# EAGLE board PIR Relay (EAGLE 9.6.2)
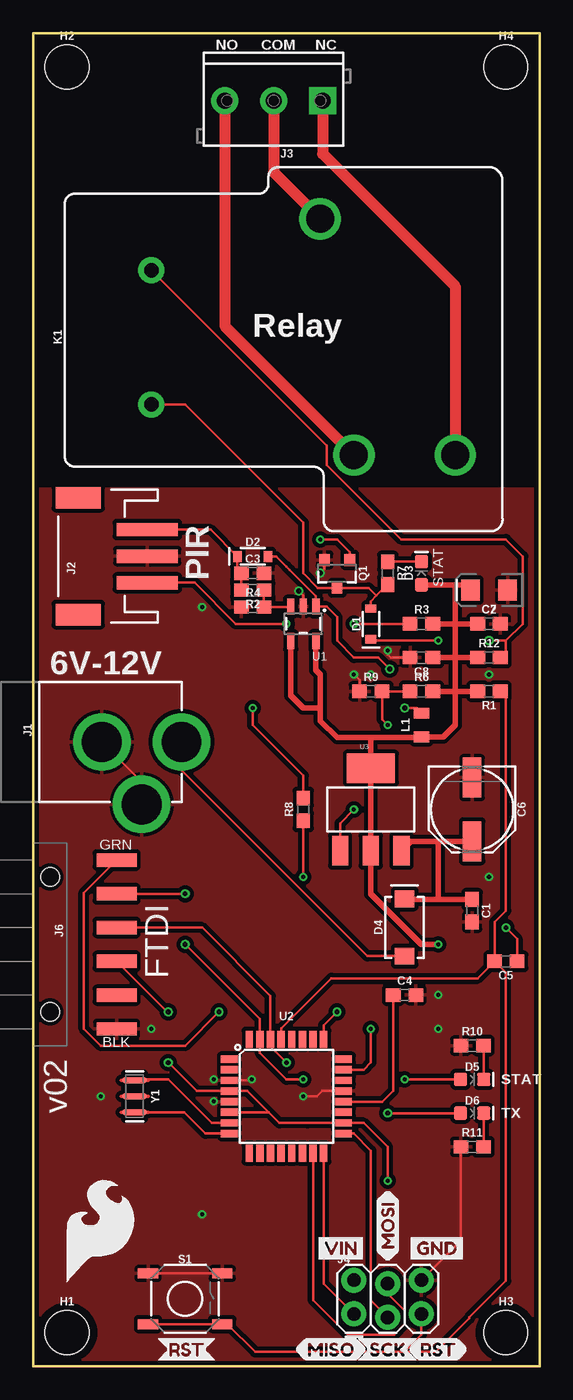
[diagram p0: board, top side]
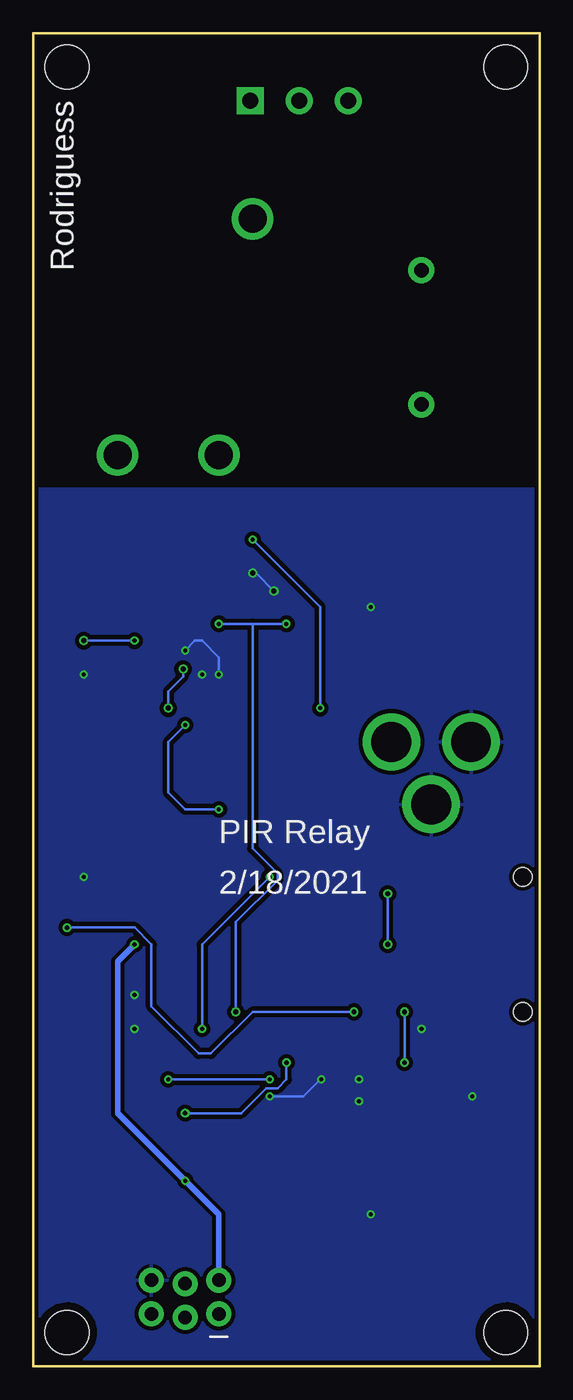
[diagram p1: board, bottom side, seen from below]

Size 38.1 x 100.33 mm. Coordinates in mm from the lower left corner, seen from the top.
Outline: 0,0 38.1,0 38.1,100.33 0,100.33 0,0
Copper layers (1*16): Top 0.035mm / dielectric 1.5mm / Bottom 0.035mm
Design rules "SparkFun-2-layer-ALC": minimum track width 7mil, minimum drill 0.3mm, track to track 8mil, track to pad 8mil, pad to pad 7mil, via to via 8mil, smd to smd 7mil, copper to edge 8mil, drill to drill 8mil, minimum pad ring 6mil, minimum via ring 6mil, stop-mask expansion 4mil, vias tented up to drill 25mil, thermal gap 10mil

## Footprints (pad centres in the part's own frame; a part is rotated, then mirrored left to right if it is on the bottom)
0603 = smd 1.1 x 1: 1 -0.85,0; 2 0.85,0
PANASONIC_D = smd 3 x 1.4: + 2.4,0; - -2.4,0
EIA3216 = smd 1.4 x 1.6: + 1.4,0; - -1.4,0
SOD-323 = smd 0.63 x 0.83: A 1.15,0; C -1.15,0
LED-0603 = smd 1 x 1: A -0.877,0; C 0.877,0
SMA-DIODE = smd 1.27 x 1.47: A -2.15,0; C 2.15,0
STAND-OFF = hole 3.302: 0,0
POWER_JACK_PTH = drill 2.997 pad 4.318: GND 0,7.7; GNDBREAK 4.7,10.7; PWR 0,13.7
JST-3-SMD = smd 1 x 4.6: 1 2.01,-4.77; 2 0.01,-4.77; 3 -1.99,-4.77 | smd 1.6 x 3.4: NC1 -4.39,0.43; NC2 4.41,0.43
SCREWTERMINAL-3.5MM-3_LOCK.007S = drill 1.2 pad 2.032 square: 1 -0.178,0 | drill 1.2 pad 2.032: 2 3.5,0; 3 7.178,0
2X3_LOCK = drill 1.016 pad 1.88: 1 0,0.127; 2 0,2.667; 3 2.54,-0.127; 4 2.54,2.413; 5 5.08,0.127; 6 5.08,2.667
1X06-SMD_RA_MALE = smd 1 x 3: 1 -6.35,5; 2 -3.81,5; 3 -1.27,5; 4 1.27,5; 5 3.81,5; 6 6.35,5 | hole 1.4: -5.08,0; 5.08,0
RELAY-T90 = drill 1.1 pad 1.956: COIL1 0,-13.9; COIL2 0,-3.81 | drill 2.1: MAIN -12.7,-17.78; NC -22.86,0; NO -15.24,0
0805 = smd 0.8 x 1.2: 1 -0.9,0; 2 0.9,0
SOT23-3 = smd 0.8 x 0.9: 1 -0.95,-1; 2 0.95,-1; 3 0,1.1
TACTILE_SWITCH_SMD_5.2MM = smd 1.524 x 0.762: 1 -2.794,1.905; 2 2.794,1.905; 3 -2.794,-1.905; 4 2.794,-1.905
SOT23-5 = smd 0.55 x 1.2: 1 -0.95,-1.3; 2 0,-1.3; 3 0.95,-1.3; 4 0.95,1.3; 5 -0.95,1.3
TQFP32-08 = smd 1.27 x 0.559: 1 -4.293,2.8; 2 -4.293,2; 3 -4.293,1.2; 4 -4.293,0.4; 5 -4.293,-0.4; 6 -4.293,-1.2; 7 -4.293,-2; 8 -4.293,-2.8; 17 4.293,-2.8; 18 4.293,-2; 19 4.293,-1.2; 20 4.293,-0.4; 21 4.293,0.4; 22 4.293,1.2; 23 4.293,2; 24 4.293,2.8 | smd 0.559 x 1.27: 9 -2.8,-4.293; 10 -2,-4.293; 11 -1.2,-4.293; 12 -0.4,-4.293; 13 0.4,-4.293; 14 1.2,-4.293; 15 2,-4.293; 16 2.8,-4.293; 25 2.8,4.293; 26 2,4.293; 27 1.2,4.293; 28 0.4,4.293; 29 -0.4,4.293; 30 -1.2,4.293; 31 -2,4.293; 32 -2.8,4.293
SOT223 = smd 1.219 x 2.235: 1 -2.311,-3.099; 2 0,-3.099; 3 2.311,-3.099 | smd 3.6 x 2.2: 4 0,3.099
RESONATOR-SMD-3.2X1.3 = smd 0.45 x 1.905: 1 -1.2,0; 2 0,0; 3 1.2,0

## Placement (x,y rotation side)
C1  0.1uF  [0603]  33.02,34.29 270 top
C2  1.0uF  [0603]  34.29,55.88 0 top
C3  1.0uF  [0603]  16.51,59.69 0 top
C4  0.1uF  [0603]  27.94,27.94 0 top
C5  0.1uF  [0603]  35.56,30.48 180 top
C6  47uF  [PANASONIC_D]  33.02,41.91 270 top
C7  10uF  [EIA3216]  34.29,58.42 180 top
C8  0.1uF  [0603]  29.21,53.34 180 top
D1  1A/23V/620mV  [SOD-323]  25.4,55.88 90 top
D2  1A/23V/620mV  [SOD-323]  16.51,60.96 0 top
D3  BLUE  [LED-0603]  29.21,59.69 90 top
D4  1A/40V/500mV  [SMA-DIODE]  27.94,33.02 90 top
D5  BLUE  [LED-0603]  33.02,21.59 0 top
D6  GREEN  [LED-0603]  33.02,19.05 0 top
FRAME1  FRAME-LEDGER  [CREATIVE_COMMONS]  -80.01,40.64 0 top  (outside the outline)
H1  STAND-OFF  [STAND-OFF]  2.54,2.54 0 top
H2  STAND-OFF  [STAND-OFF]  2.54,97.79 0 top
H3  STAND-OFF  [STAND-OFF]  35.56,2.54 0 top
H4  STAND-OFF  [STAND-OFF]  35.56,97.79 0 top
J1  POWER_JACK  [POWER_JACK_PTH]  -2.54,46.99 270 top
J2  3-PIN SMD  [JST-3-SMD]  3.81,60.96 90 top
J3  [SCREWTERMINAL-3.5MM-3_LOCK.007S]  21.59,95.25 180 top
J4  AVR_SPI_PROG_3X22X3_LOCK  [2X3_LOCK]  24.13,3.81 0 top
J6  RA 6Pin SMD  [1X06-SMD_RA_MALE]  1.27,31.75 270 top
K1  RELAY-SPDT-JQX-15F  [RELAY-T90]  8.89,68.58 180 top
L1  10μH  [0805]  29.21,48.26 90 top
Q1  600mA/40V  [SOT23-3]  22.86,59.69 180 top
R1  10k  [0603]  34.29,50.8 180 top
R2  43k  [0603]  16.51,58.42 180 top
R3  100k  [0603]  29.21,55.88 0 top
R4  5.1k  [0603]  16.51,57.15 0 top
R6  240  [0603]  29.21,50.8 0 top
R7  330  [0603]  26.67,59.69 270 top
R8  330  [0603]  20.32,41.91 90 top
R9  715  [0603]  25.4,50.8 0 top
R10  1k  [0603]  33.02,24.13 0 top
R11  1k  [0603]  33.02,16.51 0 top
R12  0  [0603]  34.29,53.34 0 top
S1  [TACTILE_SWITCH_SMD_5.2MM]  11.43,5.08 0 top
U1  AP3012  [SOT23-5]  20.32,55.88 180 top
U2  ATMEGA328P_TQFP  [TQFP32-08]  19.05,20.32 0 top
U3  [SOT223]  25.4,41.91 0 top
U$1  [MISO_I]  19.68,1.27 0 top
U$2  [MOSI_I]  26.67,7.87 90 top
U$3  [RST_I]  28.19,1.27 0 top
U$4  [SCK_O]  24.38,1.27 0 top
U$5  [GND_P]  27.94,8.89 0 top
U$6  [VIN_P]  20.95,8.89 0 top
U$7  [RST_O]  9.27,1.27 0 top
U$9  [SFE_LOGO_FLAME_.3]  5.08,10.16 0 top
Y1  [RESONATOR-SMD-3.2X1.3]  7.62,20.32 270 top

## Library data of the parts
C1 = SparkFun-Capacitors; PROD_ID: CAP-08604
C2 C3 = SparkFun-Capacitors; PROD_ID: CAP-00868
C4 C5 C8 = SparkFun-Capacitors; PROD_ID: CAP-00810
C6 = SparkFun-Capacitors; PROD_ID: CAP-08478
C7 = SparkFun-Capacitors; PROD_ID: CAP-00811
D1 D2 = SparkFun-DiscreteSemi; PROD_ID: DIO-11623
D3 D5 = SparkFun-LED; PROD_ID: DIO-08575
D4 = SparkFun-DiscreteSemi; PROD_ID: DIO-08053
D6 = SparkFun-LED; PROD_ID: DIO-00821
FRAME1 U$9 = SparkFun-Aesthetics
H1-H4 = SparkFun-Hardware
J1 = SparkFun-Connectors; PROD_ID: CONN-08197
J2 = SparkFun-Connectors; PROD_ID: CONN-12591
J3 = SparkFun-Connectors; PROD_ID: CONN-08288; SF_ID: PRT-08235
J4 = SparkFun-Connectors
J6 = SparkFun-Connectors; PROD_ID: CONN-08971
K1 = SparkFun-Electromechanical; PROD_ID: COMP-10736; SF_SKU: COM-10924
L1 = SparkFun-Coils; PROD_ID: NDUC-13231
Q1 = SparkFun-DiscreteSemi; PROD_ID: TRANS-08049
R1 = SparkFun-Resistors; PROD_ID: RES-00824
R2 = SparkFun-Resistors; PROD_ID: RES-07858
R3 = SparkFun-Resistors; PROD_ID: RES-07828
R4 = SparkFun-Resistors; PROD_ID: RES-12083
R6 = SparkFun-Resistors; PROD_ID: RES-07849
R7 R8 = SparkFun-Resistors; PROD_ID: RES-00818
R9 = SparkFun-Resistors; PROD_ID: RES-07850
R10 R11 = SparkFun-Resistors; PROD_ID: RES-07856
R12 = SparkFun-Resistors; PROD_ID: RES-08609
S1 = SparkFun-Switches; PROD_ID: SWCH-14139
U1 = SparkFun-IC-Power; PROD_ID: VREG-13911
U2 = SparkFun-IC-Microcontroller; PROD_ID: IC-09069
U3 = SparkFun-IC-Power; PROD_ID: VREG-08170
U$1-U$7 = SparkFun-Buzzard
Y1 = SparkFun-Clocks

## Nets
5V: C2.1 C7.+ C8.1 D3.A J4.2 J6.4 L1.1 R1.2 R3.2 R6.2 R12.1 U1.4 U1.5 U2.4 U2.6 U2.18 U3.2 U3.4
AREF: C4.1 U2.20
COM: J3.2 K1.MAIN
CTS: J6.5
DTR: C5.1 J6.1
FTDI-RX: D5.A J6.2 U2.31
FTDI-TX: D6.A J6.3 U2.30
GND: C1.2 C2.2 C3.2 C4.2 C6.- C7.- C8.2 J1.GND J1.GNDBREAK J2.2 J4.6 J6.6 Q1.2 R4.1 R9.1 R10.1 R11.1 S1.1 S1.2 U1.2 U2.3 U2.5 U2.21 Y1.2
MISO: J4.1 U2.16
MOSI: J4.4 U2.15
N$1: D2.A L1.2 U1.1
N$2: D5.C R10.2
N$6: Q1.1 R8.2
N$7: D1.A K1.COIL2 Q1.3 R7.2
N$8: D1.C K1.COIL1 R12.2
N$9: D3.C R7.1
N$10: U2.7 Y1.1
N$11: U2.8 Y1.3
N$12: D4.A J1.PWR
N$13: R6.1 R9.2 U3.1
N$14: D6.C R11.2
N$15: R2.1 R4.2 U1.3
NC: J3.1 K1.NC
NO: J3.3 K1.NO
PIR_#_12V: C3.1 D2.C J2.1 R2.2
PIR_#_ALARM: J2.3 R3.1 U2.25
RELAY_#_CONTROL: R8.1 U2.23
RESET: C5.2 J4.5 R1.1 S1.3 S1.4 U2.29
SCK: J4.3 U2.17
SCL: U2.28
SDA: U2.27
VIN: C1.1 C6.+ D4.C U3.3

## Tracks (layer width: path | path; a pad name or v marks a point on that pad's centre or on a via)
5V  (via drill 0.3, 0.35)
  Top 0.203: C7.+ 32.5,58.81 | v26.67,13.97 26.67,16.51 24.86,18.32 U2.18 20.63,18.32 20.62,18.32 18.51,18.32 17.71,19.12 | v10.16,22.86 12.3,20.72 U2.4 16.11,20.72 17.71,19.12 | 6.27,30.37 J6.4 10.08,26.67 v10.16,26.67 | 14.83,19.05 U2.6 17.71,19.12
  Top 0.406: 31.75,55.88 R3.2 | 32.5,58.81 31.75,58.81 | 31.75,58.81 D3.A | 31.75,53.34 C8.1 | 31.75,50.8 R6.2 | 31.75,50.8 31.75,53.34 | 31.75,55.88 31.75,53.34 | 25.4,47.31 29.16,47.31 L1.1 30.85,47.36 31.75,48.26 31.75,50.8 | 25.4,47.31 22.86,47.31 21.59,48.58 21.59,49.53 | 25.4,47.31 U3.4 U3.2 25.4,35.56 29.21,31.75 v30.48,31.75 | 31.75,55.88 31.75,58.81 | R1.2 31.75,50.8 | U1.5 21.27,52.39 21.59,52.07 21.59,49.53 | U1.4 19.37,50.48 20.32,49.53 21.59,49.53 | C2.1 31.75,55.88 | R12.1 31.75,53.34
  Bottom 0.178: v10.16,22.86 v10.16,26.67
  Bottom 0.406: v30.48,31.75 31.75,30.48 31.75,19.05 v26.67,13.97 24.13,11.43 J4.2
AREF
  Top 0.203: C4.1 27.09,20.74 26.27,19.92 U2.20
COM
  Top 0.813: J3.2 18.09,89.86 K1.MAIN
DTR  (via drill 0.35)
  Top 0.203: v35.56,33.02 36.41,32.17 C5.1 | v13.97,26.67 11.43,24.13 5.08,24.13 3.81,25.4 3.81,35.64 J6.1
  Bottom 0.203: v13.97,26.67 21.59,26.67 24.73,23.53 25.65,23.53 29.21,27.1 29.21,31.75 30.48,33.02 v35.56,33.02
FTDI-RX  (via drill 0.3, 0.35)
  Top 0.203: D5.A v27.94,21.59 | v20.32,21.59 19.05,21.59 17.05,23.59 U2.31 | v11.43,35.56 J6.2 | 17.02,24.64 U2.31 | U2.31 17.05,26.13 v11.43,31.75
  Bottom 0.178: v11.43,31.75 v11.43,35.56
  Bottom 0.203: v27.94,21.59 v20.32,21.59
FTDI-TX  (via drill 0.35)
  Top 0.203: v19.05,22.86 17.85,24.06 U2.30 17.85,27.87 12.7,33.02 J6.3 | D6.A v26.67,19.05
  Bottom 0.203: v26.67,19.05 22.45,19.05 20.57,20.93 19.71,20.93 19.05,21.59 v19.05,22.86
GND  (via drill 0.3, 0.38)
  Top 0.203: J4.6 32.17,9.44 R11.1 | S1.1 S1.2 | 29.21,27.94 C4.2 | J1.GND 8.16,43.99 J1.GNDBREAK | C8.2 26.91,53.34 26.67,53.58 v26.67,53.88 | v24.13,52.07 24.55,51.65 R9.1 | U2.21 21.74,20.72 21.34,20.32 v20.32,20.32 | v16.44,21.59 16.37,21.52 U2.3 | Q1.2 21.91,60.01 v21.59,59.69 | v19.99,58.34 20.32,58.01 U1.2
  Bottom 0.203: v26.67,53.88 25.94,54.61 25.4,54.61 24.13,53.34 v24.13,52.07 | v20.32,20.32 17.78,20.32 16.51,21.59 v16.44,21.59 | v21.59,59.69 21.34,59.69 v19.99,58.34
  other vias: 12.7,57.15 5.08,20.32 8.89,25.4 12.7,11.43 34.29,36.83 34.29,52.07 25.4,52.07 13.59,19.94 13.59,21.59 30.48,25.4 30.48,27.94
  pour Top (isolate 0.305): -1.27,66.04 -1.27,0 38.1,0 38.1,66.04
  pour Bottom (isolate 0.305): -1.27,66.04 -1.27,0 38.1,0 38.1,66.04
MISO
  Top 0.203: J4.1 21.85,6.22 U2.16
MOSI
  Top 0.203: U2.15 21.05,4.98 23.65,2.39 27.15,2.39 27.96,3.2 27.96,4.17 26.67,5.46 J4.4
N$1  (via drill 0.38)
  Top 0.178: 19.3,59.94 18.29,60.96 D2.A
  Top 0.203: 19.05,60.2 19.3,59.94 21.27,57.98 U1.1 22.07,57.18 22.86,56.39 22.86,54.61 24.13,53.34 25.97,53.34 v26.83,52.48 | v27.94,49.53 28.84,49.53 L1.2
  Bottom 0.203: v26.83,52.48 26.83,51.91 27.94,50.8 v27.94,49.53
N$2
  Top 0.203: D5.C 33.9,24.1 R10.2
N$6  (via drill 0.3)
  Top 0.203: R8.2 20.32,44.45 16.51,48.26 v16.51,49.53 | v21.59,62.23 22.86,62.23 23.81,61.28 Q1.1
  Bottom 0.203: v16.51,49.53 16.51,57.15 v21.59,62.23
N$7
  Top 0.203: K1.COIL2 11.43,72.39 20.32,63.5 20.32,59.69 21.42,58.59 Q1.3 25.23,58.59 25.82,57.99 | D1.A 25.4,57.57 25.82,57.99 | 25.82,57.99 R7.2
N$8  (via drill 0.3, 0.38)
  Top 0.178: 36.83,60.96 36.83,55.88 35.56,54.61
  Top 0.203: K1.COIL1 22.09,69.28 22.09,67.84 27.7,62.23 35.56,62.23 36.83,60.96 | v30.48,54.61 25.52,54.61 D1.C | v34.29,54.61 35.56,54.61 35.56,53.34 R12.2
  Bottom 0.203: v30.48,54.61 v34.29,54.61
N$9
  Top 0.203: R7.1 26.7,60.57 D3.C
N$10
  Top 0.203: U2.7 13.43,18.32 10.16,21.59 7.69,21.59 Y1.1
N$11
  Top 0.203: U2.8 12.96,17.52 11.36,19.12 Y1.3
N$12
  Top 0.203: D4.A 25.15,30.87 11.16,44.86 J1.PWR
N$13  (via drill 0.3)
  Top 0.203: U3.1 23.09,40.87 v24.13,41.91 | v26.67,48.26 26.25,48.68 R9.2 R6.1
  Bottom 0.203: v24.13,41.91 26.67,41.91 27.94,43.18 27.94,46.99 v26.67,48.26
N$14
  Top 0.203: R11.2 33.9,16.54 D6.C
N$15
  Top 0.203: R2.1 R4.2 19.34,57.15 U1.3
NC
  Top 0.813: J3.1 21.77,91.26 31.75,81.28 K1.NC
NO
  Top 0.813: J3.3 14.41,78.3 K1.NO
PIR_#_12V
  Top 0.203: J2.1 13.35,62.97 D2.C 15.36,59.99 C3.1 R2.2
PIR_#_ALARM  (via drill 0.3, 0.35)
  Top 0.203: J2.3 12.14,58.97 15.23,55.88 v19.05,55.88 | R3.1 v24.13,55.88 | v22.86,26.67 21.85,25.66 U2.25
  Bottom 0.203: v24.13,55.88 21.59,55.88 | 21.59,55.88 v19.05,55.88 | 21.59,55.88 21.59,38.96 19.71,37.08 19.71,36.58 22.86,33.43 v22.86,26.67
RELAY_#_CONTROL  (via drill 0.3)
  Top 0.203: R8.1 v20.32,36.83 | v25.4,25.4 25.4,22.86 24.86,22.32 U2.23
  Bottom 0.203: v20.32,36.83 25.4,31.75 v25.4,25.4
RESET
  Top 0.203: J4.5 29.21,2.36 27.94,1.09 | 27.94,1.09 16.69,1.09 14.61,3.17 S1.4 S1.3 | U2.29 18.65,25.43 22.43,29.21 33.44,29.21 C5.2 | C5.2 34.71,33.44 35.56,34.29 35.56,50.38 R1.1 | 27.94,1.09 30.3,1.09 32.82,3.61 32.82,3.68 35.56,6.42 35.56,29.63 C5.2
SCK
  Top 0.203: U2.17 24.11,17.52 25.4,16.23 25.4,4.95 J4.3
VIN
  Top 0.406: D4.C 27.97,35.14 30.48,35.14 | 30.48,35.14 C1.1 | U3.3 28.41,39.51 30.48,39.51 | 30.48,39.51 C6.+ | 30.48,39.51 30.48,35.14

## Text on the board
tPlace: NO | COM | NC | Relay | PIR | STAT | 6V-12V | GRN | FTDI | BLK | STAT | v02 | TX
bPlace: Rodriguess | PIR Relay | 2/18/2021
tDocu: Jesse Rodriguez